# EAGLE board Camera (EAGLE 9.5.2)
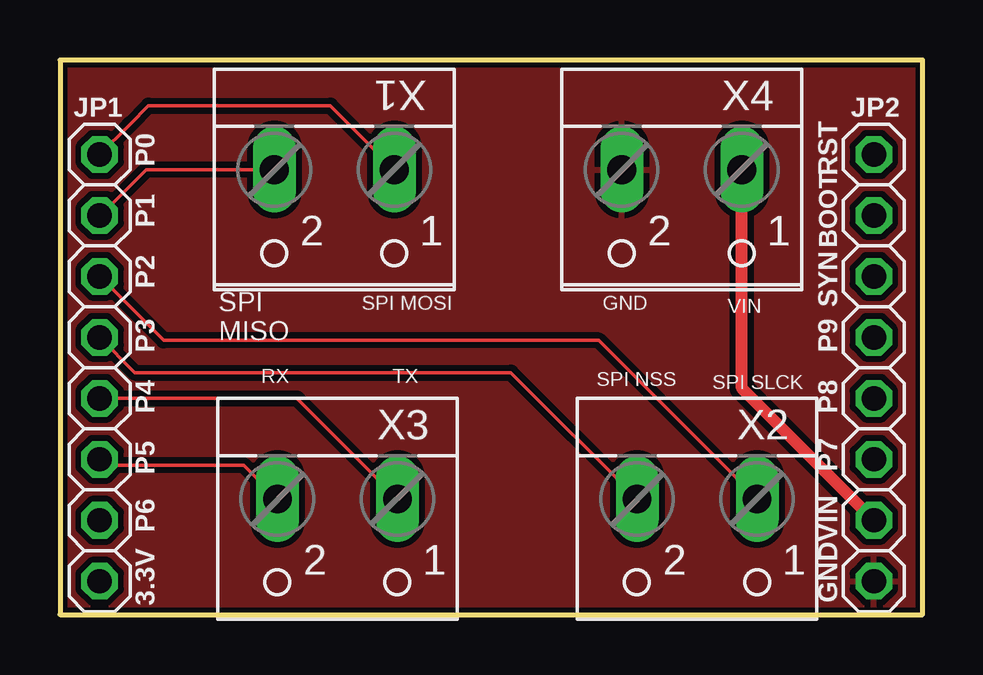
[diagram p0: board, top side]
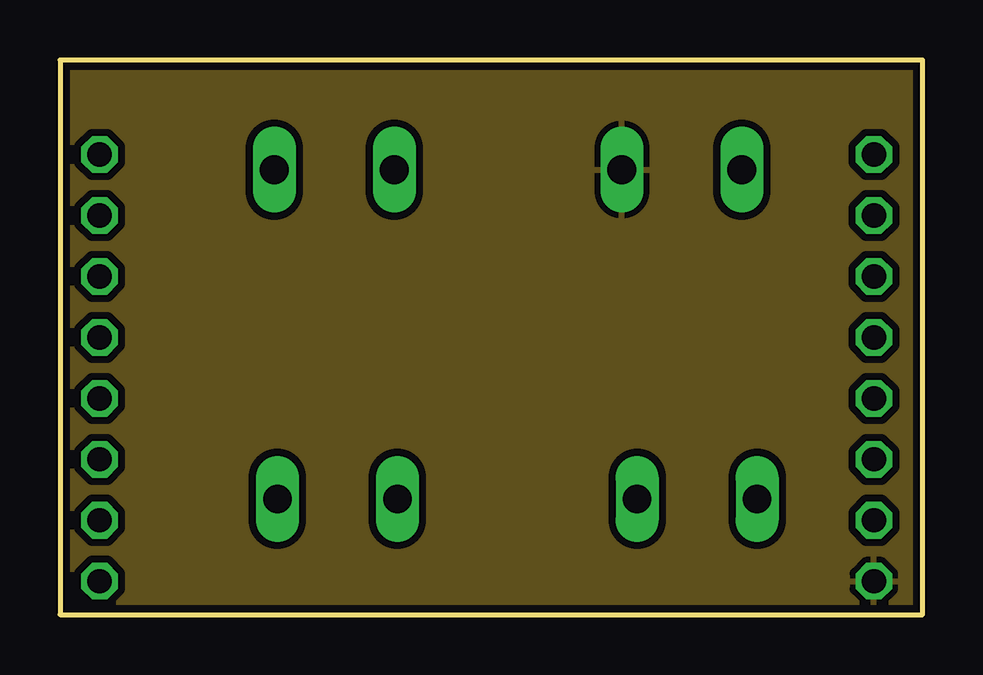
[diagram p1: board, inner layer GND]
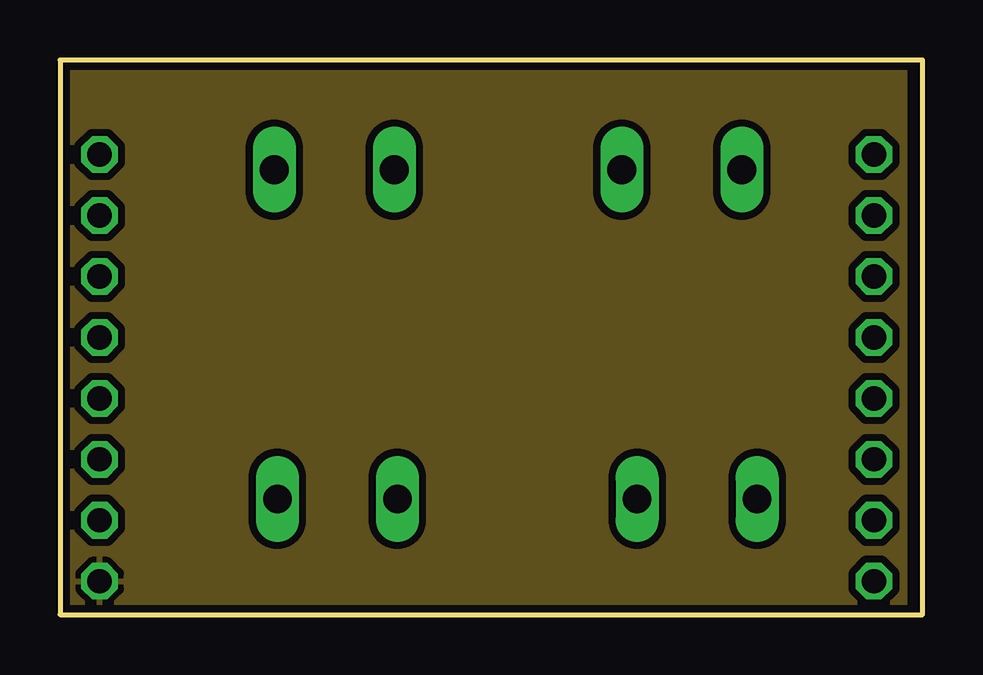
[diagram p2: board, inner layer VCC]
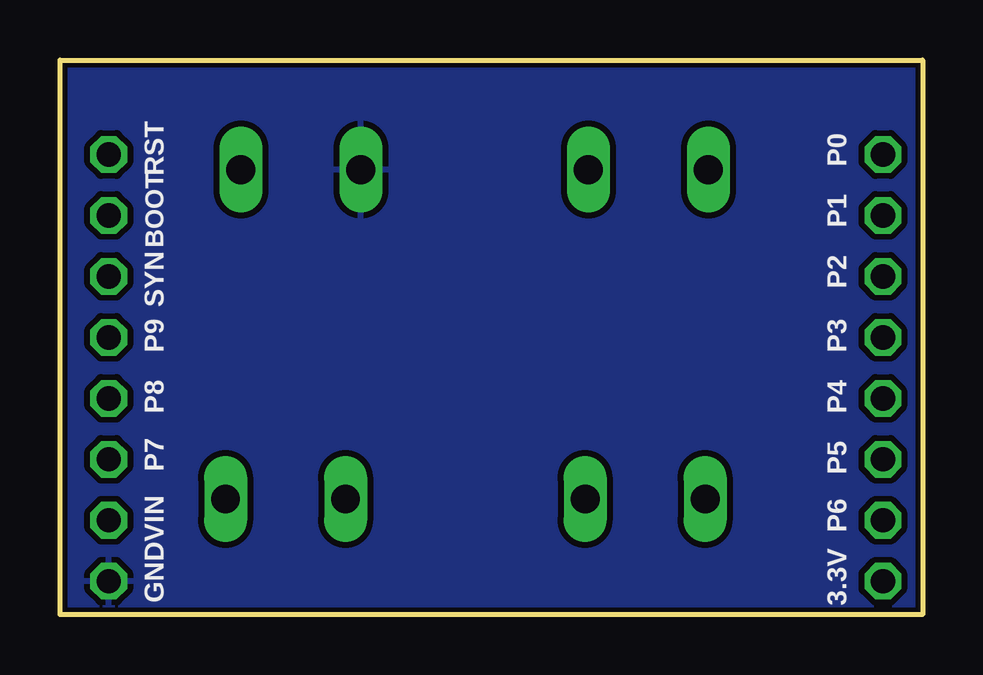
[diagram p3: board, bottom side, seen from below]

Size 35.94 x 23.11 mm. Coordinates in mm from the lower left corner, seen from the top.
Outline: 0,23.11 0,0 35.94,0 35.94,23.11 0,23.11
Copper layers (1*16): Top 0.035mm / dielectric 1.5mm / Bottom 0.035mm
Design rules "SparkFun-2-layer-STANDARD": minimum track width 10mil, minimum drill 20mil, track to track 10mil, track to pad 8mil, pad to pad 8mil, via to via 10mil, smd to smd 8mil, copper to edge 8mil, drill to drill 8mil, minimum pad ring 10mil, minimum via ring 10mil, stop-mask expansion 4mil, vias tented up to drill 25mil, thermal gap 10mil

## Footprints (pad centres in the part's own frame; a part is rotated, then mirrored left to right if it is on the bottom)
1X08 = drill 1.016 octagon: 1 -8.89,0; 2 -6.35,0; 3 -3.81,0; 4 -1.27,0; 5 1.27,0; 6 3.81,0; 7 6.35,0; 8 8.89,0
W237-102 = drill 1.194 long: 1 -2.5,-1.27; 2 2.5,-1.27

## Placement (x,y rotation side)
JP1  [1X08]  1.65,10.29 270 top
JP2  [1X08]  33.91,10.29 270 top
X1  [W237-102]  11.43,17.27 180 top
X2  [W237-102]  26.54,3.56 180 top
X3  [W237-102]  11.56,3.56 180 top
X4  [W237-102]  25.91,17.27 180 top

## Library data of the parts
JP1 JP2 = pinhead
X1-X4 = con-wago-500; MPN: 237-102; OC_FARNELL: unknown; OC_NEWARK: 70K9898

## Nets
BOOT0: JP2.2
DAC: JP1.7
DCMI_FSIN: JP2.3
GND: JP2.8 X4.2
I2C2_SCL: JP1.5 X3.1
I2C2_SDA: JP1.6 X3.2
NRST: JP2.1
SPI2_MISO: JP1.2 X1.2
SPI2_MOSI: JP1.1 X1.1
SPI2_NSS: JP1.4 X2.2
SPI2_SCLK: JP1.3 X2.1
TIM4_CH1: JP2.6
TIM4_CH2: JP2.5
TIM4_CH3: JP2.4
VCC: JP1.8
VIN: JP2.7 X4.1

## Tracks (layer width: path | path; a pad name or v marks a point on that pad's centre or on a via)
GND
  pour GND (isolate 0.305): 0,-0.13 0,44.32 35.56,44.32 35.56,-0.13
  pour Top: -0.51,23.5 -0.51,-1.27 36.45,-1.27 36.45,23.5
  pour Bottom: -0.64,23.62 -0.64,-1.14 -0.51,-1.14 36.58,-1.14 36.58,23.5 36.45,23.5
I2C2_SCL
  Top 0.152: X3.1 9.87,9.02 JP1.5
I2C2_SDA
  Top 0.152: JP1.6 1.91,6.22 7.66,6.22 X3.2
SPI2_MISO
  Top 0.152: JP1.2 1.67,16.62 3.6,18.54 X1.2
SPI2_MOSI
  Top 0.152: JP1.1 2.86,20.38 2.92,20.45 3.68,21.21 11.26,21.21 X1.1
SPI2_NSS
  Top 0.152: JP1.4 3.12,10.08 18.79,10.08 X2.2
SPI2_SCLK
  Top 0.152: X2.1 22.44,11.43 4.32,11.43 JP1.3
VCC
  pour VCC (isolate 0.305): 0.38,0.25 0.38,43.94 35.18,43.94 35.18,0.25
VIN
  Top 0.152: 28.36,18.5 X4.1
  Top 0.508: JP2.7 28.41,9.44 X4.1

## Text on the board
tPlace: P0 | RST | P1 | BOOT | P2 | SPI MOSI | GND | VIN | SYN | SPI / MISO | P3 | P9 | RX | TX | SPI NSS | SPI SLCK | P4 | P8 | P5 | P7 | P6 | VIN | 3.3V | GND
bPlace: P0 | RST | P1 | BOOT | P2 | SYN | P3 | P9 | P4 | P8 | P5 | P7 | P6 | VIN | 3.3V | GND